# Altium PCB ESPDIV-v1 pcb.PcbDoc
Units mm, origin at the board's own origin, x right, y up, seen from the top; angles counter-clockwise.
Board outline 66.28 x 78.21 mm, 2 copper layers (Top Layer, Bottom Layer); 37 components, 34 nets, 176 pads, 40 vias.
Unrouted connection lines stored in the file: 34.
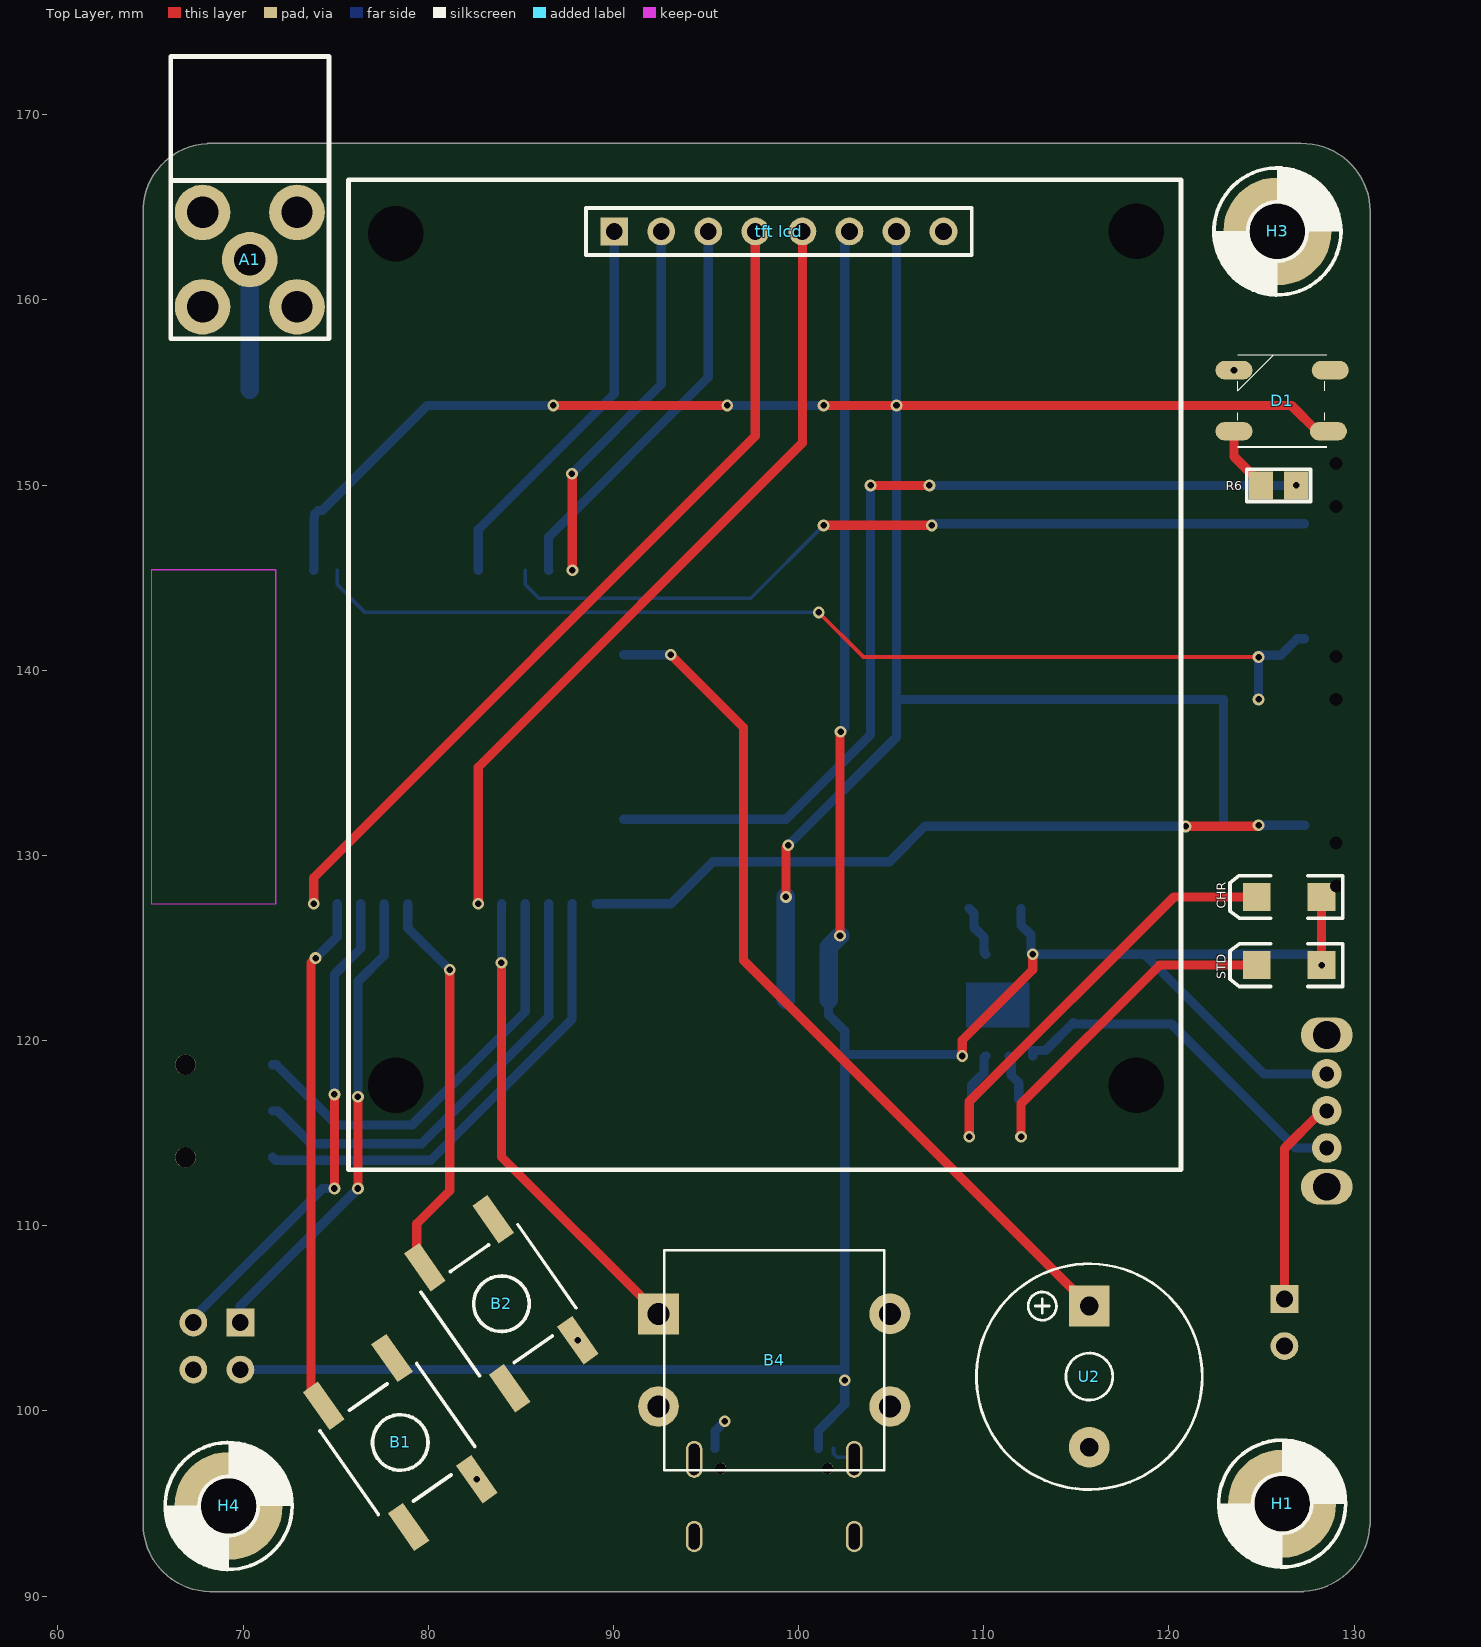
[diagram p0: Top Layer view]
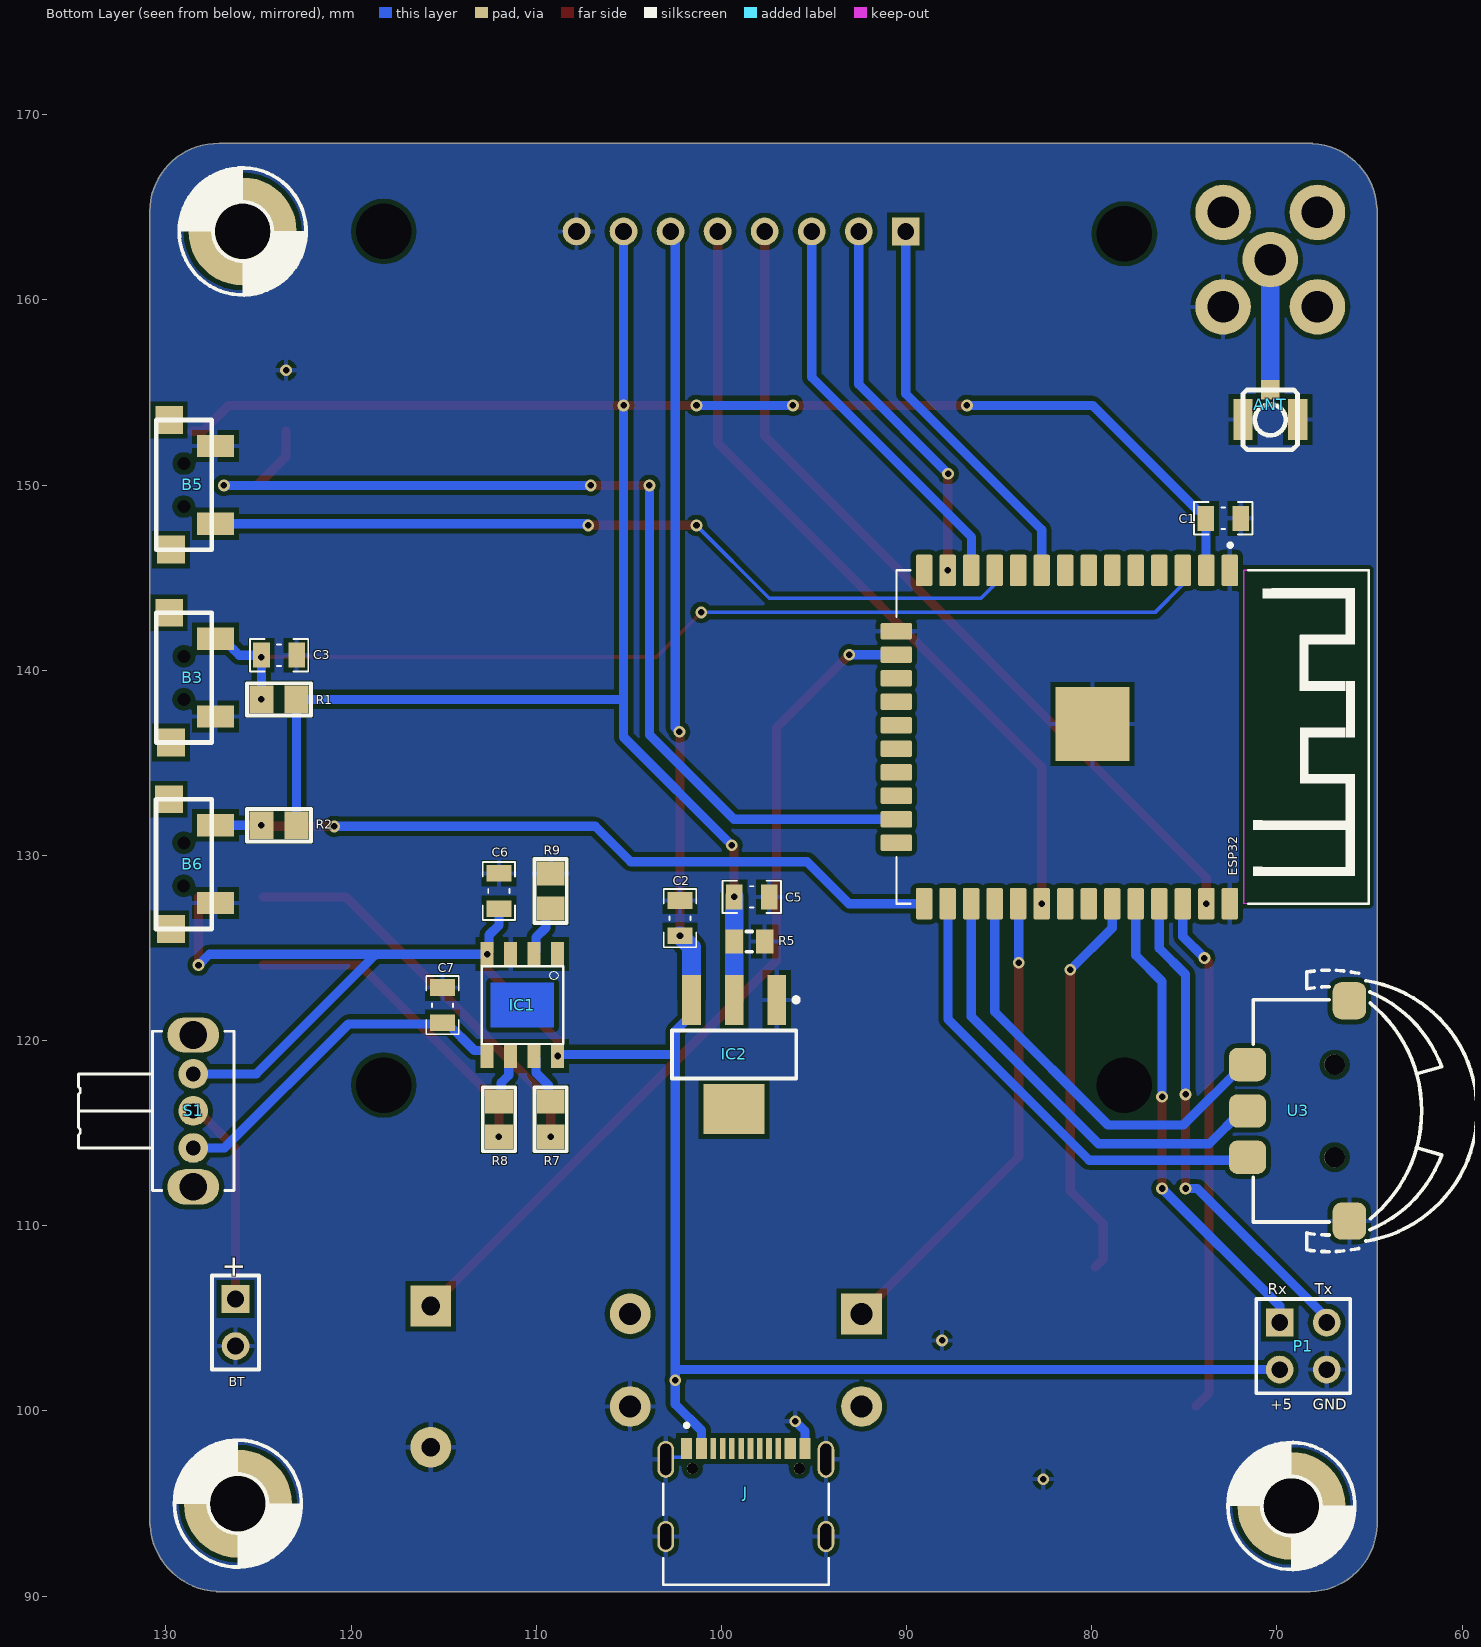
[diagram p1: Bottom Layer view, seen from below]
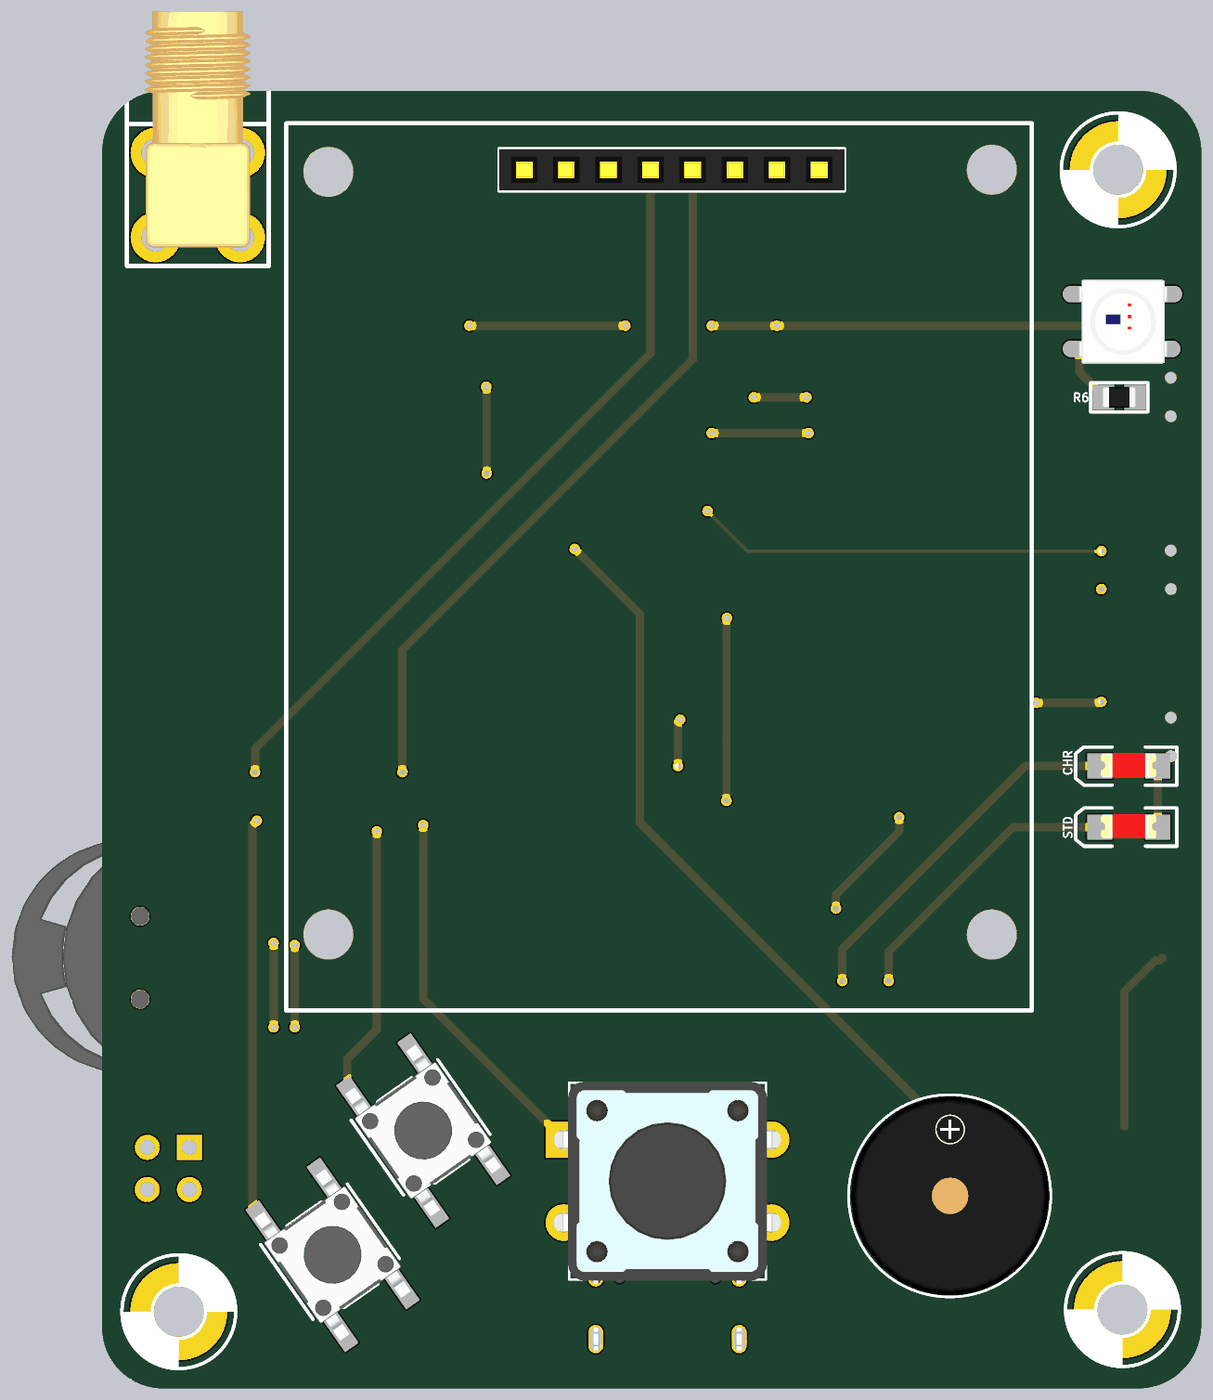
[diagram p2: 3D render of the assembled board from above, using the file's embedded part models]
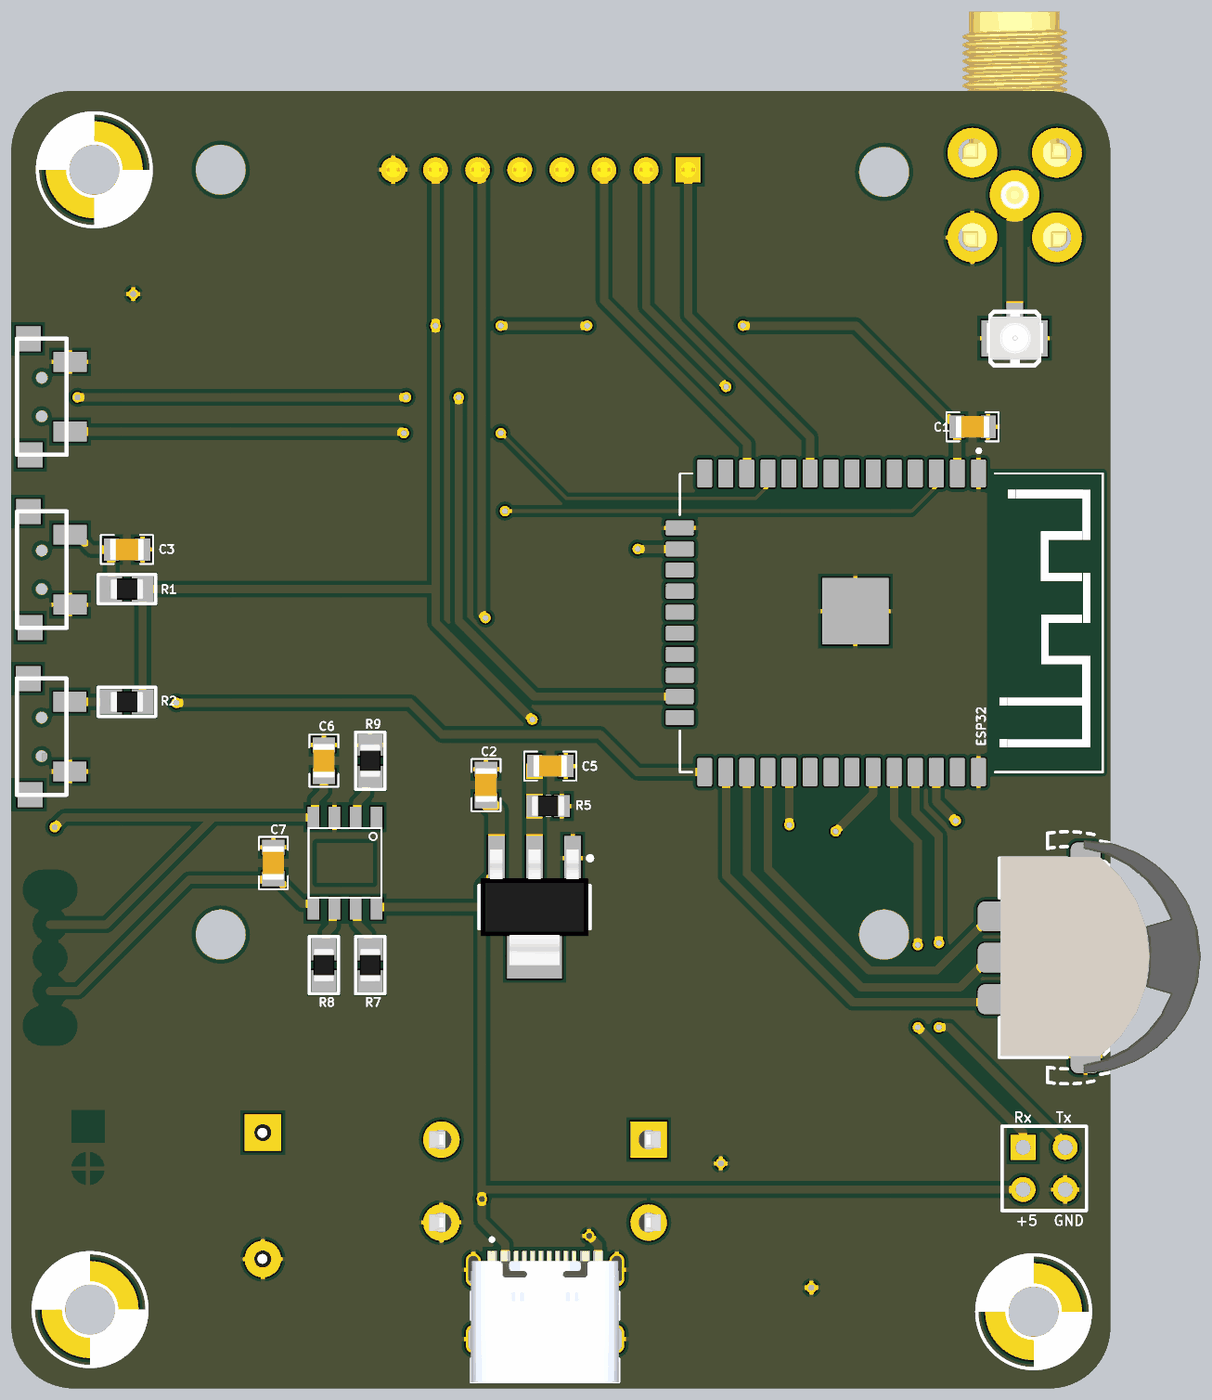
[diagram p3: 3D render of the assembled board from below, using the file's embedded part models]

## Layer stack, top to bottom
Top Solder: solder mask 0.0102, Solder Resist, Dk 3.5
Top Layer: signal copper 0.0356
Dielectric 1: dielectric 0.32, FR-4, Dk 4.8
Bottom Layer: signal copper 0.0356
Bottom Solder: solder mask 0.0102, Solder Resist, Dk 3.5

## Board outline
64.593,93.852 cw(c68.263,93.916) 64.593,93.853 cw(c68.263,93.916) 64.593,93.853 cw(c68.263,93.916) 64.593,93.98 64.593,164.973 cw(c64.643,164.973) 64.598,164.996 cw(c68.263,164.782) 68.049,168.447 cw(c68.072,168.402) 68.072,168.452 68.198,168.452 cw(c68.263,164.782) 68.327,168.452 cw(c68.263,164.782) 68.327,168.452 127.126,168.452 cw(c127.198,164.783) 130.868,164.783 cw(c127.198,164.783) 130.868,164.718 cw(c130.817,164.719) 130.86,164.693 130.86,94.108 ccw(c127.063,94.043) 130.86,94.108 cw(c127.063,94.043) 130.861,94.043 cw(c127.063,94.043) 130.86,93.979 130.86,93.853 cw(c130.81,93.853) 130.855,93.83 cw(c127.063,94.043) 127.277,90.252 cw(c127.254,90.297) 127.254,90.247 68.199,90.247 ccw(c68.199,90.297) 68.199,90.247 cw(c68.199,90.297) 68.198,90.247 cw(c68.263,93.916)

## Design rules (kind name [scope] priority, off if disabled: settings)
Clearance [All] p1: gap=0.254 ignorepadtopadclearanceinfootprint=FALSE except(0: Arc-Hole Track-Hole SMDPad-Hole THPad-Hole Via-Hole Fill-Hole Poly-Hole Region-Hole Text-Hole)
PolygonConnect [All] p1: connectstyle=Relief reliefconductorwidth=0.254 reliefentries=4 polygonreliefangle="90 Angle" airgapwidth=0.254
RoomDefinition "WiFiBox_Ultra schematic" [InComponentClass('WiFiBox_Ultra schematic')] p1: confinementstyle=ConfineIn formatcopy=TRUE lockcomponents=FALSE outline 0,0 50.8,0 50.8,25.4 0,25.4
RoutingVias [All] p1: holewidth=0.711 width=1.27 viastyle="Through Hole" minholewidth=0.711 minwidth=1.27 maxholewidth=0.711 maxwidth=1.27
SolderMaskExpansion [All] p1: expansion=0.102
Width [All] p1: maxlimit=1 minlimit=0.2 preferedwidth=0.5 minimp=50.000000 maximp=50.000000 favimp=50.000000
30 further rules are at their usual default settings.

## Components (designator, comment, footprint, x,y, rotation, side; value= is the part's Value field where it differs from the comment)
A1 "ANT" "SMA RIGHT" 70.358,162.179 r0 top
ANT "ANT U.FL" "U.FL SMD" 70.356,154.343 r0 bottom
B1 "Button" "PUSH BUTTON 4 PIN SMD 5" 78.486,98.298 r305 top
B2 "Button" "PUSH BUTTON 4 PIN SMD 5" 83.947,105.791 r305 top
B3 "BUTTON" "PUSH BUTTON SMD" 129.012,139.509 r0 bottom
B4 "Button" "PUSH BUTTON 12*12*8.5mm" 98.679,102.743 r0 top
B5 "BUTTON" "PUSH BUTTON SMD" 129.012,149.923 r0 bottom
B6 "BUTTON" "PUSH BUTTON SMD" 129.02,129.438 r0 bottom
BT "Battery" Bat 135.89,122.936 r270 bottom (schematic designator BT1)
C1 "100nf" CAP0805 72.898,148.209 r180 bottom
C2 "10uf" CAP0805 102.235,126.619 r270 bottom
C3 "100nf" CAP0805 123.891,140.815 r0 bottom
C5 "10uf" CAP0805 98.364,127.762 r0 bottom
C6 "100nf" CAP0805 112.014,128.082 r270 bottom
C7 "100nf" CAP0805 115.062,121.92 r270 bottom
CHR "Red" "LED SMD 1206" 126.492,127.762 r180 top (schematic designator CHR1)
D1 "LED RGB WS2812" "LED 5050 WS2812B" 126.111,154.559 r180 top
ESP32 "ESP-WROOM-32" MODULE_ESP-WROOM-32 80.796,136.398 r270 bottom
H1 "Round Pad" P3.0C 126.111,94.996 r0 top
H3 "Round Pad" P3.0C 125.857,163.703 r0 top
H4 "Round Pad" P3.0C 69.215,94.869 r0 top
IC1 "TP4056" SOP-8 110.744,121.92 r270 bottom
IC2 "LM1117" MP04A_M 99.314,119.253 r270 bottom
J "TYPE-C-31-M-12" HRO_TYPE-C-31-M-12 98.679,93.218 r180 bottom
P1 "Header 2X2" HDR2X2 69.85,104.775 r270 bottom
R1 "4.7k" "RES 0805" 124.841,138.43 r270 bottom
R2 "4.7k" "RES 0805" 124.841,131.633 r270 bottom
R5 "330" "RES 0805 (2012X06L)" 97.664,125.349 r0 bottom
R6 "1k" "RES 0805" 126.868,149.987 r90 top
R7 "1k" "RES 0805" 109.22,116.708 r0 bottom
R8 "1k" "RES 0805" 112.014,116.708 r0 bottom
R9 "1k" "RES 0805" 109.22,127.132 r180 bottom
S1 "1437566-3" "Subminiator SPDT switch" 108.709,78.053 r90 bottom
STD "Red" "LED SMD 1206" 126.492,124.079 r180 top (schematic designator STD1)
"tft lcd" "M-Header 8" "M-Header 8" 73.152,143.637 r0 top
U2 "Buzzer small" BUZZER 115.697,101.854 r90 top
U3 "CrescentSwitch" SWCRE_SMD_13X13 67.183,116.205 r270 bottom

## Footprints (in the part's own frame and the unit in brackets; to place one, negate y for a bottom-side part, rotate by r counter-clockwise, add the part's x,y. Pads: shape width x height; smd on the part's side, far side on the other; paste and mask are expansions set on the pad)
Bat [mm]
  rect 1.5x1.5 hole 0.9: 1(16.891,9.652)
  round 1.5 hole 0.9: 2(19.431,9.652)
  silkscreen extent 15.62,8.38 20.7,10.92
BUZZER [mm] "BUZZER"
  rect 2.2x2.2 hole 1.016: +(3.81,0)
  round 2.2 hole 1.016: -(-3.81,0)
  silkscreen extent -6.1,-6.1 6.1,6.09, body extent -6,-6.03 6,5.98, height 9.5
CAP0805 [mm] "Chip Capacitor, 2-Leads, Body 2/00x1/25mm, IPC Medium Density DESIGNER:ABBAS BASEREH"
  rect 0.9x1.35 smd: 1(-0.95,0) 2(0.95,0)
  silkscreen extent -1.58,-0.87 1.58,0.87, body extent -1.02,-0.65 1.03,0.65, height 0.5
HDR2X2 [mm] "Connector; Header; 2x2 Position"
  rect 1.5x1.5 hole 0.9: 1(0,0)
  round 1.5 hole 0.9: 2(0,2.54) 3(2.54,0) 4(2.54,2.54)
  silkscreen extent -1.27,-1.27 3.81,3.81
HRO_TYPE-C-31-M-12 [mm]
  rect 0.6x1.14 smd mask+0.05: A1_B12(-3.2,4.75) A4_B9(-2.4,4.75) B1_A12(3.2,4.75) B4_A9(2.4,4.75)
  rect 0.3x1.14 smd mask+0.05: A5(-1.25,4.75) A6(-0.25,4.75) A7(0.25,4.75) A8(1.25,4.75) B5(1.75,4.75) B6(0.75,4.75) B7(-0.75,4.75) B8(-1.75,4.75)
  oval 0.9x2 hole 0.6 slot 1.7 at 90 deg: S1(-4.325,4.17) S2(4.325,4.17)
  oval 0.9x1.7 hole 0.6 slot 1.4 at 90 deg: S3(-4.325,0) S4(4.325,0)
  round 0.6 hole 0.6 unplated: ""(-2.89,3.68) ""(2.89,3.68)
  silkscreen extent -4.47,-2.6 4.47,6.1, body extent -4.47,-2.6 4.47,5.3, height 3.31
"LED 5050 WS2812B" [mm]
  oval 2x1 smd: 1(-2.5,1.65) 2(-2.6,-1.65) 3(2.6,-1.65) 4(2.6,1.65)
  silkscreen extent -2.41,-2.49 2.4,2.51, body extent -2.74,-2.49 2.66,2.51, height 1.6
"LED SMD 1206" [mm]
  rect 1.5x1.5 smd: 1(-1.75,0) 2(1.75,0)
  silkscreen extent -2.9,-1.15 3.2,1.15, body extent -1.65,-0.76 1.65,0.69, height 1.36
"M-Header 8" [mm]
  rect 1.5x1.5 hole 0.9: 1(16.891,20.066)
  round 1.5 hole 0.9: 2(19.431,20.066) 3(21.971,20.066) 4(24.511,20.066) 5(27.051,20.066) 6(29.591,20.066) 7(32.131,20.066) 8(34.671,20.066)
  silkscreen extent 15.37,18.8 36.2,21.34, body extent 15.37,18.82 36.19,21.32, height 5
MODULE_ESP-WROOM-32 [mm]
  rrect22% 1.7x0.9 smd: 1(-9,8.255) 2(-9,6.985) 3(-9,5.715) 4(-9,4.445) 5(-9,3.175) 6(-9,1.905) 7(-9,0.635) 8(-9,-0.635) 9(-9,-1.905) 10(-9,-3.175) 11(-9,-4.445) 12(-9,-5.715) 13(-9,-6.985) 14(-9,-8.255) 25(9,-8.255) 26(9,-6.985) 27(9,-5.715) 28(9,-4.445) 29(9,-3.175) 30(9,-1.905) 31(9,-0.635) 32(9,0.635) 33(9,1.905) 34(9,3.175) 35(9,4.445) 36(9,5.715) 37(9,6.985) 38(9,8.255)
  rect 4x4 smd: 1.1(-0.7,0.845)
  rrect22% 0.9x1.7 smd: 15(-5.715,-9.755) 16(-4.445,-9.755) 17(-3.175,-9.755) 18(-1.905,-9.755) 19(-0.635,-9.755) 20(0.635,-9.755) 21(1.905,-9.755) 22(3.175,-9.755) 23(4.445,-9.755) 24(5.715,-9.755)
  Keep-Out Layer region: 9,9.024 -9.024,9.024 -9.024,15.75 9,15.75
  Keep-Out Layer region: 9,9.012 -9.012,9.012 -9.012,15.75 9,15.75
  Keep-Out Layer region: 9,9.026 -9.026,9.026 -9.026,15.75 9,15.75
  silkscreen extent -10.46,-9.75 9,15.75
MP04A_M [mm] "SOT223, 4-Leads, Body 6.5x3.5mm, Pitch 2.3mm, Lead Span 7mm, IPC Low Density"
  rect 2.7x1 smd: 1(-2.95,2.3) 2(-2.95,0) 3(-2.95,-2.3)
  rect 2.7x3.3 smd: 4(2.95,0)
  silkscreen extent -3.07,-3.35 1.3,3.47, body extent -3.49,-3.24 3.49,3.24, height 1.64
P3.0C [mil] "MOUNTING PAD 3.0 mm, round, 5.8 mm Diameter"
  round 230 hole 118.11: P(0,0)
  silkscreen extent -135,-135 135,135
"PUSH BUTTON 4 PIN SMD 5" [mm]
  rect 2.5x1 smd: 1(-3.992,2.25) 2(-3.993,-2.25) 3(3.992,-2.25) 4(3.993,2.25)
  silkscreen extent -3,-3.2 3,3.18, body extent -4.5,-3 4.5,3, height 5
"PUSH BUTTON 12*12*8.5mm" [mm] "12*12mm vertical type,THT,  height 8.5mm, salmon actuator, 360gf, Bulk"
  rect 2.2x2.2 hole 1.2: 1(-6.25,2.5)
  round 2.2 hole 1.2: 2(-6.25,-2.5) 3(6.25,-2.5) 4(6.25,2.5)
  silkscreen extent -5.94,-5.94 5.94,5.94, body extent -6.99,-6 6.99,6, height 8.6
"PUSH BUTTON SMD" [mm]
  rect 1.5x1.5 smd: 1(0.712,3.405) 4(0.812,-3.595)
  rect 2x1.2 smd: 2(-1.688,2.005) 3(-1.688,-2.195)
  round 0 hole 0.7: ""(0.012,-1.245) ""(0.02,1.079)
  silkscreen extent -1.49,-3.6 1.51,3.4
"RES 0805" [mm] "RES 0805"
  rect 1.5x1.3 smd: 1(0,0) 2(0,1.9)
  silkscreen extent -0.87,-0.78 0.87,2.68, body extent -0.63,-0.07 0.64,1.97, height 0.6
"RES 0805 (2012X06L)" [mm] "Chip Resistor, 2-Leads, Body 2.0x1.3mm, IPC High Density _ (0.100 W)"
  rect 0.95x1.3 smd: 1(0,0) 2(1.65,0)
  silkscreen extent 0.68,-0.55 0.97,0.55, body extent -0.19,-0.63 1.84,0.64, height 0.6
"SMA RIGHT" [mm] "RF ANTENA"
  round 3 hole 1.7: 1(2.55,-2.55) 2(-2.55,-2.55) 3(-2.55,2.55) 4(2.55,2.55) 5(0,0)
  silkscreen extent -4.28,-4.28 4.28,10.97, body extent -3.16,-3.15 3.16,11.05, height 10.43
SOP-8 [mm]
  rect 1.3x0.7 smd: 1(-2.75,1.905) 2(-2.75,0.635) 3(-2.75,-0.635) 4(-2.75,-1.905) 5(2.75,-1.905) 6(2.75,-0.635) 7(2.75,0.635) 8(2.75,1.905)
  Top Layer region: 1.2,-1.7 -1.2,-1.7 -1.2,1.7 1.2,1.7
  silkscreen extent -2.1,-2.2 2.1,2.2
"Subminiator SPDT switch" [mm]
  round 1.6 hole 0.8: 1(40.152,19.815) 2(38.152,19.815) 3(36.152,19.815)
  oval 1.9x2.8 hole 1.5: M2(34.052,19.815) M2(42.252,19.815)
  silkscreen extent 33.85,17.62 42.45,26.01, body extent 33.84,17.54 42.45,25.91, height 4.7
SWCRE_SMD_13X13 [mm] "SWITCH, CRESCENT, 13X13mm, SMD"
  rrect50% 2x1.8 smd: 1(-5.95,1.1) 5(5.95,1.1)
  rrect50% 1.8x2 smd: 2(-2.5,-4.4) 3(0,-4.4) 4(2.5,-4.4)
  round 1.1 hole 1.1: ""(-2.5,0.3) ""(2.5,0.3)
  silkscreen extent -7.6,-4.1 7.6,8, body extent -7.1,-4.04 6.96,8.04, height 2.38
"U.FL SMD" [mm] "U.FL Antenna-Design:Ali Hafizi"
  rect 1x1.05 smd: 1(0.002,-0.8)
  rect 1.05x2.2 smd: 2(-1.475,0.8) 2(1.475,0.8)
  silkscreen extent -1.47,-0.8 1.47,2.44, body extent -1.73,-0.76 1.67,2.34, height 1.25

## Part data
A1: library part "SMA - ANTENA", "ANTENA"
ANT: "Antenna", Ali Hafizi="Ali Hafizi"
B1 B2: library part "PUSH BUTTON 4 PIN", "PUSH BUTTON"
B3 B5 B6: library part "PUSH BUTTON RIGHT", "PUSH BUTTON"
B4: library part "TACTILE SWITCH", "TACTILE SWITCH"
C1 C2 C3 C5 C6 C7: library part "CAP SMD", "Capacitor"
CHR STD: library part LED, "LED", Adding Date=1387/12/22, Color=Red, Designer="Saeid Jorablo", Organazation=ControTec, Size="SMD 1206"
D1: "LED"
ESP32: "WiFi 802.11b/g/n/d/e/i Transceiver Module 2.4GHz Surface Mount", Package="Module Olimex LTD", Availability=Unavailable, MF="Olimex LTD", MP=ESP-WROOM-32, Price=None, SnapEDA_Link=https://www.snapeda.com/parts/ESP-WROOM-32/Olimex%20LTD/view-part/2311927/?ref=snap
H1 H3 H4: library part MOUNT-PAD-ROUND, "MOUNTING PAD, round"
IC1: "Complete single cell Li-Ion battery with a constant current / constant voltage linear charger", Package="Package Analog Devices", Availability=Unavailable, MF="NanJing Top Power ASIC Corp.", MP=TP4056, Price=None, SnapEDA_Link=https://www.snapeda.com/parts/TP4056%20/NanJing%20Top%20Power%20ASIC%20Corp./view-part/2888426/?ref=snap
IC2: library part LM1117IMP-x.x, "x.x Volt, 800mA Low-Dropout Linear Regulator, 4-pin SOT-223", Manufacturer="National Semiconductor", PackageTopMarking=XYTT*N05B, PartNumber=LM1117IMP-3.3, PowerWise=N, Supplier Part Number 1=7614123, Code_IPC=SOT223-4, Code_JEDEC=TO-261-AA, ComponentLink1Description="LM1117 Datasheet", ComponentLink1URL=http://www.national.com/ds/LM/LM1117.pdf, ComponentLink2Description="LM1117 Web Page", ComponentLink2URL=http://www.national.com/pf/LM/LM1117.html, ComponentLink3Description="MP04A Package Page", ComponentLink3URL=http://www.national.com/packaging/folders/mp04a.html, CompType="LDO IC", DatasheetVersion=Apr-2006, PackageDescription="Molded SOT-223, 6.50 x 3.56 x 1.6mm Body, 4 Lead, 2.3mm Pitch", PackageReference=MP04A, PackageVersion="revB, Apr-2003", PinCount=4, Published=4-Dec-2008, Publisher="Altium Limited", RoHS=N, Supplier 1=Farnell
J: "USB Connectors 24 Receptacle 1 8.94*7.3mm RoHS", Package=Package, Availability="Not in stock", Check_prices=https://www.snapeda.com/parts/TYPE-C-31-M-12/HRO+Electronics+Co.%252C+Ltd./view-part/?ref=eda, MF="HRO Electronics Co., Ltd.", MP=TYPE-C-31-M-12, Price=None, SnapEDA_Link=https://www.snapeda.com/parts/TYPE-C-31-M-12/HRO+Electronics+Co.%252C+Ltd./view-part/?ref=snap
P1: "Header, 2-Pin, Dual row", LatestRevisionDate=17-Jul-2002, LatestRevisionNote="Re-released for DXP Platform.", Publisher="Altium Limited"
R1 R2 R5 R6 R7 R8 R9: library part RES, "RESISTOR"
S1: library part "Subminiator SPDT switch"
U2: library part Buzzer, "5-12v small buzzer (12mm)"
U3: library part SWCRE_SMD_13X13, "SWITCH, CRESCENT, 13X13mm, SMD", =https://makatronicteam.com, DESIGN BY=A-SHAMSAEI, PARAM=PARAM, PARAM2=PARAM2

## Free pads (board coordinates)
  round 1.524 hole 3: 12(78.232,117.602) 12(78.232,163.576) 12(118.237,117.602) 12(118.237,163.703)

## Via types
v1: diameter 0.635, hole 0.356, Top Layer to Bottom Layer, 40 vias

## Nets (pads, with @x,y where several pads share a name; then routed paths per layer and width w, separated by ;. In a path a pad name is that pad's centre, name@x,y a point inside that pad or via, vN(x,y) a via of type N, cw(c..) or ccw(c..) an arc to the next point about the centre after c; other vN are vias at no path point)
3v3: "tft lcd.7" C1.1 C5.2 D1.1 ESP32.2 IC2.2 R1.2 R2.2 R5.2 | length 129.3
  Top Layer w0.5: v1(86.741,154.305) v1(96.139,154.305) ; v1(99.314,127.762) 99.314,130.429 v1(99.441,130.556) ; v1(101.346,154.305) v1(105.283,154.305) 126.619,154.305 128.015,152.909 D1.1
  Bottom Layer w0.5: ESP32.2 73.829,145.416 73.829,148.19 C1.1 73.848,148.434 74.048,148.634 74.273,148.634 79.944,154.305 v1(86.741,154.305) ; v1(96.139,154.305) v1(101.346,154.305) ; v1(99.441,130.556) 105.283,136.398 105.283,138.43 ; 105.283,163.703 v1(105.283,154.305) 105.283,138.43 ; R2.2 R1.2 105.283,138.43
  Bottom Layer w1: IC2.2 R5.2 v1(99.314,127.762)
+5v: "tft lcd.6" C2.2 C6.2 CHR.1 IC1.4 IC1.8 IC2.3 J.A4_B9 P1.3 S1.1 STD.1 | length 147.9
  Top Layer w0.5: v1(102.235,125.669) 102.235,136.652 v1(102.267,136.684) ; v1(108.839,119.17) 108.839,120.015 112.649,123.825 v1(112.649,124.67) ; v1(128.242,124.079) CHR.1
  Bottom Layer w0.5: P1.3 102.489,102.235 ; J.A4_B9 101.079,98.946 102.489,100.356 v1(102.489,101.663) 102.489,102.235 ; IC2.3 101.614,121.398 102.489,120.523 102.489,119.253 ; v1(102.267,136.684) 102.489,136.906 102.489,163.449 102.743,163.703 ; v1(108.839,119.17) 108.756,119.253 102.489,119.253 ; C6.2 112.014,126.238 112.549,125.703 112.549,124.77 v1(112.649,124.67) 127.651,124.67 v1(128.242,124.079) ; 118.745,124.587 125.127,118.205 S1.1 ; 102.489,102.235 102.489,119.253
  Bottom Layer w1: IC2.3 101.614,125.048 v1(102.235,125.669)
BAT: C7.2 IC1.5 S1.3 | length 19.6
  Bottom Layer w0.5: IC1.5 112.649,119.47 113.337,119.47 114.837,120.97 114.903,120.904 120.142,120.904 126.841,114.205 S1.3
CE: "tft lcd.2" ESP32.13 | length 20.3
  Top Layer w0.5: v1(87.757,150.622) 87.769,150.61 87.769,145.41 v1(87.781,145.398)
  Bottom Layer w0.5: v1(87.757,150.622) 92.583,155.448 92.583,163.703
CLK: "tft lcd.5" ESP32.30 | length 43.6
  Top Layer w0.5: v1(82.701,127.398) 82.701,134.771 100.203,152.273 100.203,163.703
D/C: "tft lcd.3" ESP32.12 | length 21.9
  Bottom Layer w0.5: ESP32.12 86.487,145.422 86.487,147.193 95.123,155.829 95.123,163.703
DIN: "tft lcd.4" ESP32.37 | length 46.2
  Top Layer w0.5: v1(73.811,127.398) 73.811,128.802 97.663,152.654 97.663,163.703
GND: "tft lcd.8" A1.1 ANT.2 B1.4 B2.4 B3.2 B4.3 B5.3 B6.2 BT.2 C1.2 C2.1 C3.1 C5.1 C6.1 C7.1 D1.3 ESP32.1 ESP32.1.1 ESP32.15 ESP32.38 IC1.3 IC2.1 J.A1_B12 J.B1_A12 J.S1 J.S2 J.S3 J.S4 P1.4 R5.1 R9.2 U2.- U3.5 | length 3.2
  Bottom Layer w0.2: J.A1_B12 101.879,97.698 102.079,97.498 102.894,97.498 J.S1
  Bottom Layer w0.5: J.B1_A12 95.479,98.908 v1(96.012,99.441)
  other v1: 82.619,96.318 88.08,103.811 123.511,156.209
GPIO0: B6.3 ESP32.25 R2.1 | length 40
  Top Layer w0.5: v1(120.904,131.572) 124.743,131.572 124.804,131.633 v1(124.841,131.633)
  Bottom Layer w0.5: ESP32.25 93.108,127.398 95.377,129.667 104.902,129.667 106.807,131.572 v1(120.904,131.572) ; v1(124.841,131.633) B6.3
IO4: ESP32.26 U3.4 | length 25.6
  Bottom Layer w0.5: U3.4 71.75,113.538 80.137,113.538 87.757,121.158 87.757,127.374 ESP32.26
IO5: B4.1 ESP32.29 | length 25.7
  Top Layer w0.5: v1(83.947,124.206) 83.947,113.725 B4.1
  Bottom Layer w0.5: v1(83.947,124.206) 83.947,127.374 ESP32.29
IO13: ESP32.16 U2.+ | length 47.1
  Top Layer w0.5: v1(93.091,140.843) 97.028,136.906 97.028,124.333 U2.+
  Bottom Layer w0.5: ESP32.16 v1(93.091,140.843)
IO15: ESP32.23 R6.1 | length 51.7
  Top Layer w0.5: v1(103.886,149.987) v1(107.061,149.987)
  Bottom Layer w0.5: ESP32.23 99.314,131.953 103.886,136.525 v1(103.886,149.987) ; v1(107.061,149.987) v1(126.868,149.987)
IO16: ESP32.27 U3.3 | length 24.6
  Bottom Layer w0.5: U3.3 71.882,116.205 73.66,114.427 79.629,114.427 86.511,121.309 ESP32.27
IO17: ESP32.28 U3.2 | length 23.4
  Bottom Layer w0.5: U3.2 71.795,118.705 75.057,115.443 79.121,115.443 85.241,121.563 ESP32.28
IO19: ESP32.31
IO21: B2.2 ESP32.33 | length 21.5
  Top Layer w0.5: B2.2 79.375,108.21 79.375,110.109 81.153,111.887 v1(81.153,123.825)
  Bottom Layer w0.5: ESP32.33 78.891,126.087 v1(81.153,123.825)
IO22: B1.2 ESP32.36 | length 28
  Top Layer w0.5: v1(73.914,124.46) 73.66,124.206 73.66,100.971 B1.2
  Bottom Layer w0.5: v1(73.914,124.46) 75.081,125.627 ESP32.36
IO25: ESP32.10
IO26: B5.2 ESP32.11 | length 44.8
  Top Layer w0.5: v1(101.346,147.828) v1(107.188,147.828)
  Bottom Layer w0.2: ESP32.11 85.241,144.629 85.979,143.891 97.409,143.891 v1(101.346,147.828)
  Bottom Layer w0.5: v1(107.188,147.828) 107.278,147.918 B5.2
IO32: ESP32.8
NetA1_5: A1.5 ANT.1 | length 7
  Bottom Layer w1: ANT.1 A1.5
NetBT1_1: BT.1 S1.2 | length 11.3
  Top Layer w0.5: BT.1 126.238,114.173 128.117,116.052 128.371,116.052 S1.2
NetCHR1_2: CHR.2 R7.2 | length 22
  Top Layer w0.5: v1(109.22,114.808) 109.22,116.713 120.269,127.762 CHR.2
NetD1_4: D1.4 R6.2 | length 3.5
  Top Layer w0.5: D1.4 123.511,151.544 124.968,150.087 R6.2
NetIC1_2: IC1.2 R9.1 | length 2.8
  Bottom Layer w0.5: R9.1 109.474,126.878 109.474,126.111 110.009,125.576 110.009,124.77 IC1.2
NetIC1_6: IC1.6 R8.1 | length 2.7
  Bottom Layer w0.5: IC1.6 111.479,119.07 111.479,118.137 111.887,117.729 111.887,116.835 R8.1
NetIC1_7: IC1.7 R7.1 | length 2.8
  Bottom Layer w0.5: R7.1 109.347,116.835 109.347,117.602 110.009,118.264 110.009,119.07 IC1.7
NetR8_2: R8.2 STD.2 | length 17.6
  Top Layer w0.5: v1(112.014,114.808) 112.014,116.586 119.507,124.079 STD.2
RESET: B3.3 C3.2 ESP32.3 R1.1 | length 57.4
  Top Layer w0.2: v1(101.092,143.129) 103.505,140.716 v1(124.841,140.716)
  Bottom Layer w0.2: ESP32.3 75.081,144.629 76.581,143.129 v1(101.092,143.129)
  Bottom Layer w0.5: v1(124.841,138.43) v1(124.841,140.716) C3.2 126.041,140.815 126.334,141.108 126.334,141.114 126.924,141.704 B3.3
RST: "tft lcd.1" ESP32.9 | length 21.3
  Bottom Layer w0.5: ESP32.9 82.701,147.598 90.043,154.94 90.043,163.703
RX_0: ESP32.34 P1.1 | length 25.8
  Top Layer w0.5: v1(76.2,112.014) v1(76.2,116.967)
  Bottom Layer w0.5: P1.1 69.85,105.664 v1(76.2,112.014) ; v1(76.2,116.967) 76.2,123.19 77.621,124.611 ESP32.34
SHIELD: 
TX_0: ESP32.35 P1.2 | length 26.7
  Top Layer w0.5: v1(74.93,112.014) v1(74.93,117.094)
  Bottom Layer w0.5: P1.2 67.31,105.029 74.295,112.014 v1(74.93,112.014) ; v1(74.93,117.094) 74.93,123.571 76.351,124.992 ESP32.35
pads on no net: A1.2 A1.3 A1.4 B1.1 B1.3 B2.1 B2.3 B3. B3.1 B3.4 B4.2 B4.4 B5. B5.1 B5.4 B6. B6.1 B6.4 D1.2 ESP32.4 ESP32.5 ESP32.6 ESP32.7 ESP32.14 ESP32.17 ESP32.18 ESP32.19 ESP32.20 ESP32.21 ESP32.22 ESP32.24 ESP32.32 H1.P H3.P H4.P IC1.1 IC2.4 J. J.A5 J.A6 J.A7 J.A8 J.B4_A9 J.B5 J.B6 J.B7 J.B8 S1.M2 U3. U3.1

## Polygon pours and split planes (outlines as drawn)
GND on Bottom Layer "Top Layer-No Net" (solid, remove dead copper, pour order 2): 64.593,93.852 cw(c68.263,93.916) 64.593,93.853 cw(c68.263,93.916) 64.593,93.853 cw(c68.263,93.916) 64.593,93.98 64.593,164.973 cw(c64.643,164.973) 64.598,164.996 cw(c68.263,164.782) 68.049,168.447 cw(c68.072,168.402) 68.072,168.452 68.198,168.452 cw(c68.263,164.782) 68.327,168.452 cw(c68.263,164.782) 68.327,168.452 127.126,168.452 cw(c127.198,164.783) 130.868,164.783 cw(c127.198,164.783) 130.868,164.718 cw(c130.817,164.719) 130.86,164.693 130.86,94.108 ccw(c127.063,94.043) 130.86,94.108 cw(c127.063,94.043) 130.861,94.043 cw(c127.063,94.043) 130.86,93.979 130.86,93.853 cw(c130.81,93.853) 130.855,93.83 cw(c127.063,94.043) 127.277,90.252 cw(c127.254,90.297) 127.254,90.247 68.199,90.247 ccw(c68.199,90.297) 68.199,90.247 cw(c68.199,90.297) 68.198,90.247 cw(c68.263,93.916)

## Silkscreen, mask and mechanical layers (free items; w line width, h text height)
Top Overlay:
  lines w0.254: 75.69,113.027 75.69,166.497 120.65,166.497 120.65,113.027 75.69,113.027
Mechanical 1:
  lines w0.1: 64.643,93.98 ccw(c68.263,93.916) 68.199,90.297 127.254,90.297 ; 64.643,164.846 cw(c68.263,164.782) 68.326,168.402 ; 64.643,164.973 64.643,93.853 ; 68.072,168.402 127.254,168.402 ; 127.127,90.297 ccw(c127.063,94.043) 130.81,94.107 ; 127.127,168.402 cw(c127.198,164.783) 130.817,164.719 ; 130.81,93.853 130.81,164.846 ; 64.643,93.853 64.643,93.853

## Text inside footprints (layer, text, board x,y; h text height)
BT: Bottom Overlay "+" at 126.815,108.445 h1.15 r90
J: Mechanical 13 "PCB EDGE" at 93.479,91.318 h0.61
P1: Bottom Overlay "Rx" at 70.485,106.299 h0.6; Bottom Overlay "Tx" at 67.945,106.299 h0.6; Bottom Overlay "GND" at 68.072,100.076 h0.6; Bottom Overlay "+5" at 70.358,100.076 h0.6